# EAGLE board Prototype 0.1 (EAGLE 9.7.0)
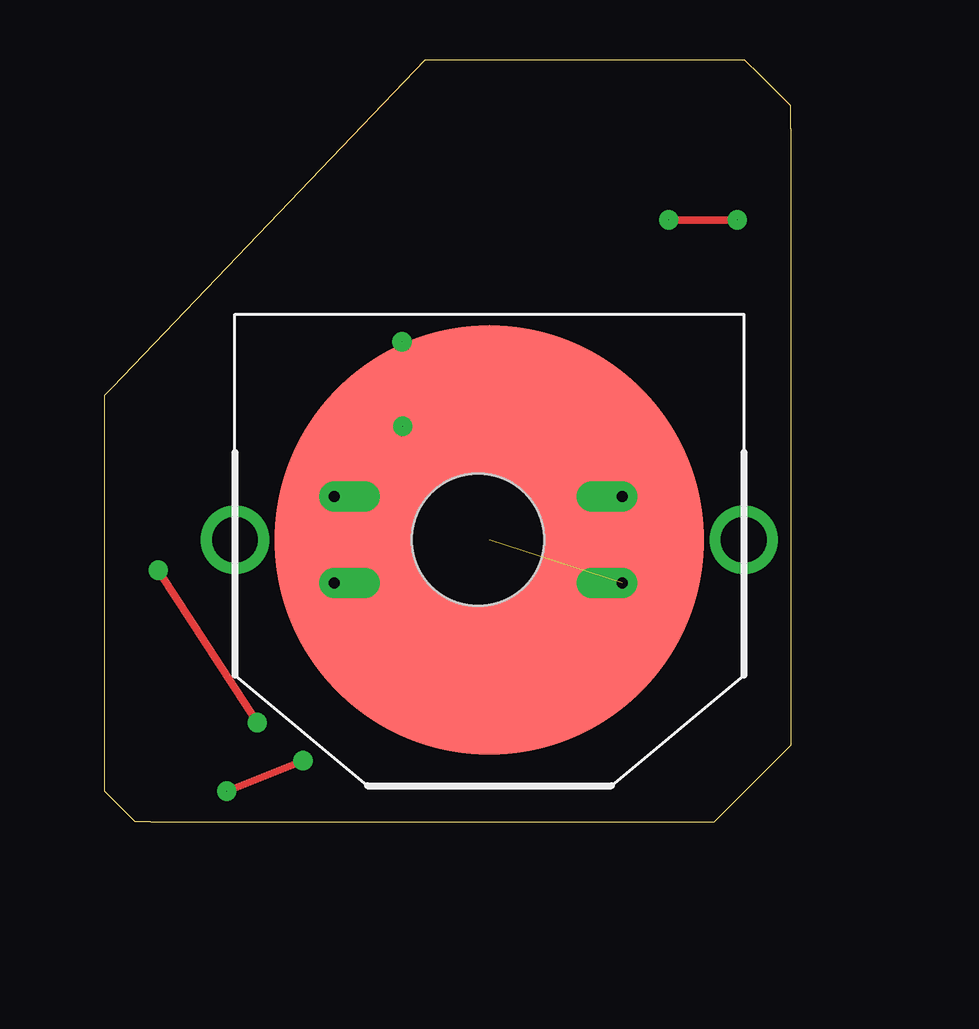
[diagram p0: board, top side]
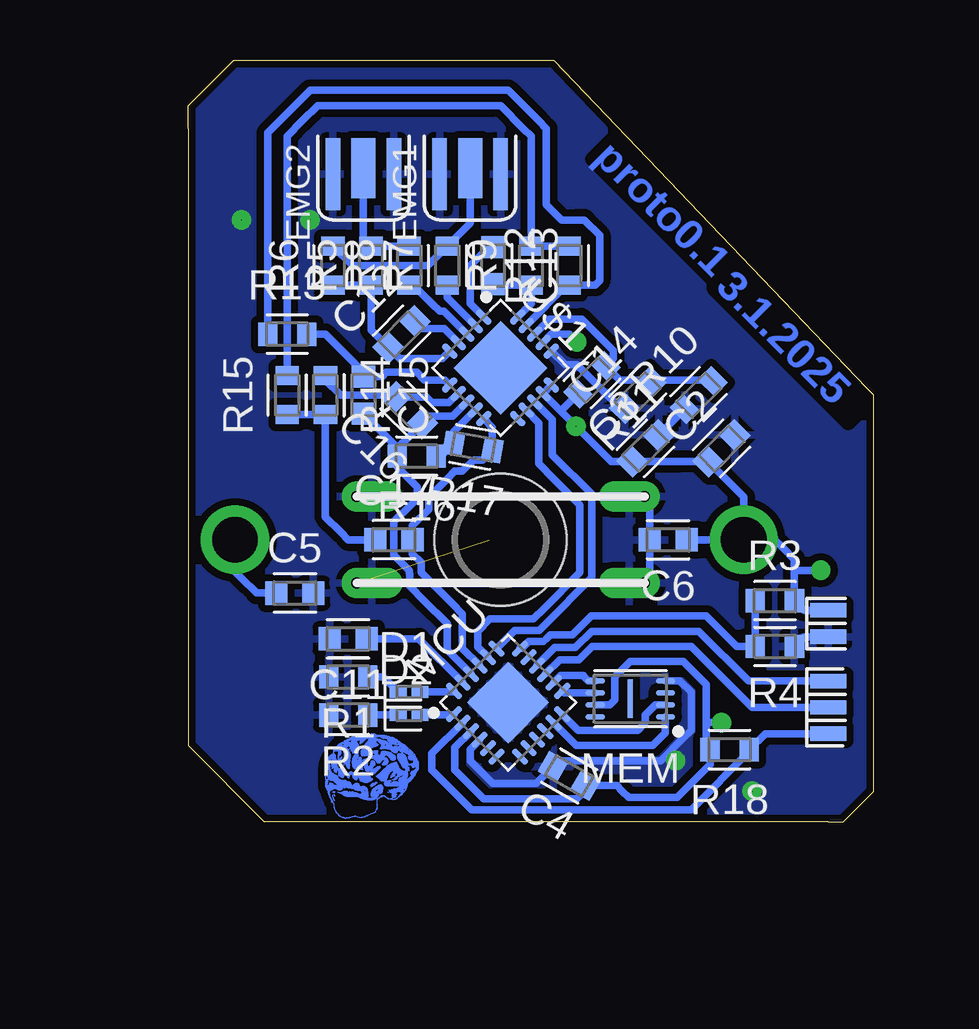
[diagram p1: board, bottom side, seen from below]

Size 28.57 x 31.75 mm. Coordinates in mm from the lower left corner, seen from the top.
Outline: 1.9,0 25.4,0 28.58,3.18 28.58,28.89 28.58,29.84 27.31,31.12 26.67,31.75 13.34,31.75 0.32,18.1 0,17.78 0,1.27 1.27,0 1.59,0 1.9,0
Copper layers (1*16): Top 0.035mm / dielectric 1.5mm / Bottom 0.035mm
Design rules "Fusion Electronics Design Rules": minimum track width 6mil, minimum drill 0.35mm, track to track 6mil, track to pad 6mil, pad to pad 6mil, via to via 6mil, smd to smd 6mil, copper to edge 12mil, drill to drill 6mil, minimum pad ring 10mil, minimum via ring 8mil, stop-mask expansion 4mil, vias tented up to drill 0mil, thermal gap 10mil

## Footprints (pad centres in the part's own frame; a part is rotated, then mirrored left to right if it is on the bottom)
BAT-HLD-005-THM = smd 17.9 x 17.9: P$1 0,0 | drill 1.9 pad 2.6: P$2 -10.6,0; P$3 10.6,0
CAPC1608X85 = smd 0.921 x 0.97: 1 -0.775,0; 2 0.775,0
ELECTRODE_CONNECTOR = drill 0.45 pad 1.27 offset: P$1 -6,1.8; P$2 -6,-1.8; P$3 6,-1.8; P$4 6,1.8 | hole 5.5: 0,0
LEDC1005X25N_FLAT-R = smd 0.7 x 0.5: A 0.45,0; C -0.45,0
LEDC1005X25N_FLAT-Y = smd 0.7 x 0.5: A 0.45,0; C -0.45,0
SHIELDED-SMD = smd 3 x 0.6: GND1 0,1.27; GND2 0,-1.27 | smd 2.5 x 1: SIG 0.25,0
QFN50P400X400X100-25T240 = smd 0.837 x 0.27: 1 -1.937,1.25; 2 -1.937,0.75; 3 -1.937,0.25; 4 -1.937,-0.25; 5 -1.937,-0.75; 6 -1.937,-1.25; 13 1.937,-1.25; 14 1.937,-0.75; 15 1.937,-0.25; 16 1.937,0.25; 17 1.937,0.75; 18 1.937,1.25 | smd 0.27 x 0.837: 7 -1.25,-1.937; 8 -0.75,-1.937; 9 -0.25,-1.937; 10 0.25,-1.937; 11 0.75,-1.937; 12 1.25,-1.937; 19 1.25,1.937; 20 0.75,1.937; 21 0.25,1.937; 22 -0.25,1.937; 23 -0.75,1.937; 24 -1.25,1.937 | smd 2.4 x 2.4: 25 0,0
SON50P300X200X50-8 = smd 0.787 x 0.22: 1 -1.462,0.75; 2 -1.462,0.25; 3 -1.462,-0.25; 4 -1.462,-0.75; 5 1.462,-0.75; 6 1.462,-0.25; 7 1.462,0.25; 8 1.462,0.75 | smd 0.2 x 1.6: 9 0,0
RESC1608X60 = smd 0.799 x 0.974: 1 -0.815,0; 2 0.815,0
3X = smd 1.5 x 0.6: 1 0,1.1; 2 0,0; 3 0,-1.1
2X = smd 1.5 x 0.6: 1 0,0.55; 2 0,-0.55
QFN50P400X400X80-21T275 = smd 0.8 x 0.3: 1 -2,1; 2 -2,0.5; 3 -2,0; 4 -2,-0.5; 5 -2,-1; 11 2,-1; 12 2,-0.5; 13 2,0; 14 2,0.5; 15 2,1 | smd 0.3 x 0.8: 6 -1,-2; 7 -0.5,-2; 8 0,-2; 9 0.5,-2; 10 1,-2; 16 1,2; 17 0.5,2; 18 0,2; 19 -0.5,2; 20 -1,2 | smd 2.75 x 2.75: 21 0,0

## Placement (x,y rotation side)
BAT  2025BAT-HLD-005-THM  [BAT-HLD-005-THM]  16.02,11.75 0 top
C2  100n  [CAPC1608X85]  6.35,15.56 45 bottom
C3  100n  [CAPC1608X85]  9.53,15.56 45 bottom
C4  100n  [CAPC1608X85]  12.7,1.91 150 bottom
C5  100n  [CAPC1608X85]  24.13,9.53 0 bottom
C6  100n  [CAPC1608X85]  8.57,11.75 180 bottom
C11  10u  [CAPC1608X85]  21.91,7.62 180 bottom
C12  1n  [CAPC1608X85]  19.68,20.32 45 bottom
C13  220n  [CAPC1608X85]  15.88,23.18 270 bottom
C14  100n  [CAPC1608X85]  9.84,17.78 45 bottom
C15  220n  [CAPC1608X85]  21.27,17.78 270 bottom
C16  22n  [CAPC1608X85]  19.38,17.14 135 bottom
C17  1.5n  [CAPC1608X85]  20,11.75 0 bottom
CON  GND ELECTRODE  [ELECTRODE_CONNECTOR]  15.56,11.75 0 bottom
D1  LED_RED  [LEDC1005X25N_FLAT-R]  19.37,5.4 0 bottom
D2  LED_YELLOW  [LEDC1005X25N_FLAT-Y]  19.37,4.45 0 bottom
EMG1  SHIELDED-CONNECTOR  [SHIELDED-SMD]  16.83,26.99 90 bottom
EMG2  SHIELDED-CONNECTOR  [SHIELDED-SMD]  21.27,26.99 90 bottom
MCU  MSPM0G1107T  [QFN50P400X400X100-25T240]  15.24,4.96 45 bottom
MEM  MX25V80066USON8L  [SON50P300X200X50-8]  10.15,5.12 180 bottom
R1  100R  [RESC1608X60]  21.91,6.03 180 bottom
R2  100R  [RESC1608X60]  21.91,4.45 180 bottom
R3  140k  [RESC1608X60]  4.13,9.21 0 bottom
R4  140k  [RESC1608X60]  4.13,7.3 180 bottom
R5  10M  [RESC1608X60]  20.95,23.18 90 bottom
R6  10M  [RESC1608X60]  22.54,23.18 90 bottom
R7  180k  [RESC1608X60]  17.78,23.18 90 bottom
R8  180k  [RESC1608X60]  19.37,23.18 90 bottom
R9  140k  [RESC1608X60]  14.29,23.18 90 bottom
R10  10M  [RESC1608X60]  7.3,17.78 45 bottom
R11  10M  [RESC1608X60]  11.75,18.41 225 bottom
R12  140k  [RESC1608X60]  12.7,23.18 90 bottom
R13  1.4M  [RESC1608X60]  24.45,20.32 0 bottom
R14  44k  [RESC1608X60]  22.86,17.78 270 bottom
R15  44k  [RESC1608X60]  24.45,17.78 90 bottom
R16  100k  [RESC1608X60]  19.05,15.24 180 bottom
R17  1M  [RESC1608X60]  16.7,15.62 170 bottom
R18  47k  [RESC1608X60]  6.01,3 180 bottom
SWD  SWD  [3X]  1.9,4.76 180 bottom
SWD-PWR  PWR  [2X]  1.9,8.26 180 bottom
U$1  AD8232LFCSP  [QFN50P400X400X80-21T275]  15.56,18.91 315 bottom

## Library data of the parts
BAT = batery holder
C2-C6 C11-C17 = Capacitor; CATEGORY: Capacitor; PACKAGE_SIZE: 0603; PACKAGE_TYPE: SMD; SUBCATEGORY: Ceramic Capacitors; TYPE: MLCC
CON EMG1 EMG2 U$1 = Ecg Electrodes
D1 = LED; CATEGORY: LED; COLOR: RED; DESCRIPTION: CHIP LED FLAT; SUB-CATEGORY: CHIP; TYPE: FLAT_TOP
D2 = LED; CATEGORY: LED; COLOR: YELLOW; DESCRIPTION: CHIP LED FLAT; SUB-CATEGORY: CHIP; TYPE: FLAT_TOP
MCU = Texas Instruments
MEM = MemoryChips
R1-R18 = Resistor; CATEGORY: Resistors; DESCRIPTION: Chip Resistor 1.60 X 0.82 X 0.60 mm body 0603(1608-METRIC) Package; PACKAGE_SIZE: 0603; PACKAGE_TYPE: SMD
SWD SWD-PWR = DebugConnectors§

## Nets
BATT_VOLTAGE [Analog]: MCU.18 R3.1 R4.2
COM_CE [Data]: MCU.6
COM_CS [Data]: MCU.5
COM_IRQ [Data]: MCU.7
EMG_DIFFERENTIAL [Analog]: C17.2 MCU.21 R17.1 U$1.10
EMG_EN [Data]: MCU.19 U$1.13
EMG_LEAD_OFF [Data]: MCU.20 U$1.12
EMG_REFFERENCE [Analog]: C15.2 C16.1 MCU.22 R16.2 U$1.8
GND: BAT.P$1 C2.2 C3.2 C4.2 C5.2 C6.2 C11.2 C14.1 CON.P$1 CON.P$2 CON.P$3 CON.P$4 EMG1.GND1 EMG1.GND2 EMG2.GND1 EMG2.GND2 MCU.4 MCU.25 MEM.4 R1.2 R2.2 R4.1 R10.1 SWD-PWR.1 U$1.16
MEM_CS [Data]: MCU.11 MEM.1
N$2 [VCC]: C11.1 MCU.23
N$3: D1.C R1.1
N$4: D2.C R2.1
N$8 [Data]: D1.A MCU.24
N$9 [Data]: D2.A MCU.1
N$10 [Analog]: EMG1.SIG R6.2 R7.2
N$11 [Analog]: EMG2.SIG R5.2 R8.2
N$12 [Analog]: R7.1 U$1.2
N$13 [Analog]: R8.1 U$1.3
N$14 [Analog]: C16.2 R14.1 U$1.7
N$16 [Analog]: R16.1 R17.2 U$1.9
N$17 [Analog]: R9.2 R12.2 R15.2
N$18 [Analog]: C12.1 R5.1 R6.1 U$1.5
N$19 [Analog]: C13.1 U$1.1
N$20 [Analog]: C13.2 R9.1 U$1.20
N$22 [Analog]: C14.2 R10.2 R11.1 U$1.18
N$24 [Analog]: C15.1 R13.2 U$1.6
N$25: C17.1 R14.2 R15.1
N$26 [Analog]: R12.1 R13.1 U$1.19
N$27 [Analog]: C12.2 U$1.4
RST [Data]: MCU.2 R18.1 SWD.1
SPI0_MISO [Data]: MCU.9
SPI0_MOSI [Data]: MCU.8
SPI0_SCK [Data]: MCU.10
SPI1_MISO [Data]: MCU.12 MEM.2
SPI1_MOSI [Data]: MCU.14 MEM.5
SPI1_SCK [Data]: MCU.13 MEM.6
SWCLK [Data]: MCU.16 SWD.3
SWDIO [Data]: MCU.15 SWD.2
VCC [VCC]: BAT.P$2 BAT.P$3 C2.1 C3.1 C4.1 C5.1 C6.1 MCU.3 MEM.7 R3.2 R11.2 R18.2 SWD-PWR.2 U$1.14 U$1.15 U$1.17

## Tracks (layer width: path | path; a pad name or v marks a point on that pad's centre or on a via)
BATT_VOLTAGE
  Bottom 0.305: R3.1 R4.2 5.71,7.3 6.99,8.57 11.77,8.57 12.56,7.78 13.49,7.78 13.65,7.62 13.77,7.5 14.38,7.5 14.67,7.21 MCU.18
EMG_DIFFERENTIAL
  Bottom 0.305: MCU.21 17.15,7.22 17.15,8.26 17.15,8.66 17.58,9.09 18.87,10.38 18.87,10.79 19.23,11.16 C17.2 19.23,12.34 18.55,13.02 18.55,13.52 17.78,14.29 17.46,14.6 17.15,14.6 16.67,15.08 16.3,15.08 R17.1 15.9,16.43 U$1.10
EMG_EN
  Bottom 0.305: MCU.19 14.96,7.98 13.94,7.98 13.66,8.26 11.79,10.13 | U$1.13 13.4,16.76 13.4,15.29 11.77,13.65 11.77,10.15 | 11.79,10.13 11.77,10.15 | 11.79,10.13 11.77,10.15
EMG_LEAD_OFF
  Bottom 0.305: 12.25,10.38 12.25,13.02 12.25,13.2 13.34,14.29 13.97,14.92 13.97,15.56 13.97,16.62 U$1.12 | MCU.20 16.51,7.29 16.51,7.94 16.01,8.44 15.24,8.44 14.19,8.44 13.74,8.89 | 13.74,8.89 12.25,10.38 | 13.74,8.89 12.25,10.38
EMG_REFFERENCE
  Bottom 0.305: MCU.22 17.78,7.15 17.78,7.62 17.78,8.26 18.73,9.21 19.35,9.82 19.35,10.34 19.37,10.36 19.37,10.48 20,11.11 20,12.38 20,12.5 19.37,13.14 19.03,13.48 19.03,13.95 19.37,14.29 19.87,14.79 R16.2 | U$1.8 17.56,16.91 18.51,16.91 C16.1 19.35,16.08 19.87,15.56 R16.2 | C15.2 19.87,15.6 R16.2
GND  (via drill 0 pad 0.8)  (1 unrouted)
  Top 0.305: v8.26,2.54 v5.08,1.27 | v26.35,25.08 v23.49,25.08
  Bottom 0.305: U$1.16 12.86,19.05 12.38,19.05 10.56,17.23 C14.1 10.39,17.69 | MCU.4 16.83,3.02 16.83,2.54 15.87,1.59 14.6,1.59 14.08,1.59 C4.2 13.12,2.54 12.07,2.54 8.89,2.54 7.94,3.49 7.62,3.81 7.62,4.76 7.62,5.4 8.09,5.87 MEM.4 | R4.1 2.91,7.71 SWD-PWR.1 | C3.2 R10.1 | CON.P$3 9.35,10.16 C6.2 9.35,13.34 CON.P$4
  pour Bottom (isolate 0.305): 1.33,0.15 25.34,0.15 28.42,3.24 28.42,29.78 26.61,31.6 13.08,31.6 0.15,18.67 0.15,1.33
MEM_CS
  Bottom 0.305: MCU.11 12.39,3.18 10.79,3.18 9.21,3.18 8.69,3.69 MEM.1
N$2
  Bottom 0.305: C11.1 18.96,7.62 MCU.23
N$3
  Bottom 0.305: R1.1 20.45,6.03 D1.C
N$4
  Bottom 0.305: D2.C R2.1
N$8
  Bottom 0.305: D1.A 17.54,5.4 MCU.24
N$9
  Bottom 0.305: D2.A 17.52,4.45 MCU.1
N$10
  Bottom 0.305: R6.2 21.73,23.18 21.59,23.18 18.6,23.18 R7.2 16.83,24.95 16.83,26.99 | EMG1.SIG 16.83,26.99 | 16.83,26.99 16.83,26.67
N$11
  Bottom 0.305: R8.2 R5.2 21.27,24.31 21.27,26.99 EMG2.SIG
N$12
  Bottom 0.305: U$1.2 17.78,21.84 R7.1
N$13
  Bottom 0.305: U$1.3 17.92,21.27 18.1,21.27 18.42,21.59 19.19,22.36 R8.1
N$14
  Bottom 0.305: U$1.7 17.72,17.46 18.42,17.46 18.65,17.69 C16.2 20.01,17.78 22.22,17.78 22.86,18.41 R14.1
N$16
  Bottom 0.305: 18.03,15.24 R16.1 18.03,15.24 | U$1.9 17.5,16.26 R17.2 18.03,15.24
N$17
  Bottom 0.305: R12.2 R9.2 14.29,28.57 14.6,28.89 15.56,29.84 19.05,29.84 23.18,29.84 23.81,29.21 24.45,28.57 R15.2
N$18
  Bottom 0.305: U$1.5 18,19.3 19.76,19.3 C12.1 20.95,20.49 R5.1 R6.1
N$19
  Bottom 0.305: U$1.1 16.83,21.6 16.83,23.18 16.05,23.95 C13.1
N$20
  Bottom 0.305: U$1.20 14.29,21.6 R9.1 15.83,22.36 C13.2
N$22
  Bottom 0.305: U$1.18 13.52,20.96 12.18,20.96 10.85,19.63 10.85,19.31 R11.1 10.59,18.41 10.16,18.41 9.38,18.41 C14.2 9.21,18.41 6.78,18.41 R10.2
N$24
  Bottom 0.305: U$1.6 17.89,18.41 18.42,18.41 18.73,18.41 19.05,18.73 19.37,18.73 20.32,18.73 20.5,18.55 C15.1 21.27,18.73 21.91,19.37 22.86,20.32 R13.2
N$25
  Bottom 0.305: C17.1 21.91,11.75 22.22,12.07 22.86,12.7 R14.2 R15.1
N$26
  Bottom 0.305: U$1.19 12.82,22.36 R12.1 11.61,22.36 11.43,22.54 11.43,24.45 12.07,25.08 12.38,25.08 13.02,25.08 13.65,25.72 13.65,27.62 13.65,28.89 13.97,29.21 15.24,30.48 23.49,30.48 24.45,29.53 25.26,28.71 R13.1
N$27
  Bottom 0.305: C12.2 18.82,20.55 17.9,20.55 U$1.4
RST
  Bottom 0.305: SWD.1 4.28,3.66 4.54,3.66 R18.1 5.2,2.92 7.62,0.5 16.76,0.5 18.42,2.15 18.42,2.54 18.42,2.85 MCU.2
SPI1_MISO
  Bottom 0.305: MCU.12 12.32,3.81 9.84,3.81 9.52,4.13 9.52,4.45 9.1,4.87 MEM.2
SPI1_MOSI
  Bottom 0.305: MEM.5 11.9,5.87 12.07,6.03 12.12,6.09 13.05,6.09 MCU.14
SPI1_SCK
  Bottom 0.305: MCU.13 12.91,5.37 MEM.6
SWCLK
  Bottom 0.305: MCU.16 13.29,7.26 12.44,7.26 11.76,7.94 7.29,7.94 5.22,5.86 SWD.3
SWDIO
  Bottom 0.305: MCU.15 13.1,6.75 12.3,6.75 11.75,7.3 7.62,7.3 6.35,6.03 5.08,4.76 SWD.2
VCC  (via drill 0 pad 0.8)
  Top 0.305: v6.35,4.13 v2.22,10.48 | v12.38,20 12.41,19.97 v12.41,16.48
  Bottom 0.305: MCU.3 17.46,3.09 17.46,2.16 16.26,0.95 12.38,0.95 12.03,1.31 C4.1 10.73,1.52 10.48,1.27 10.22,1.02 8.19,1.02 6.83,2.38 R18.2 6.99,3.16 6.99,4.13 | MEM.7 11.01,4.87 10.79,5.08 10.79,6.03 10.16,6.67 8.57,6.67 7.94,6.67 7.62,6.35 6.99,5.72 6.99,4.13 | U$1.15 U$1.14 13.05,17.11 | 13.05,17.11 R11.2 | U$1.17 13.44,20.32 13.02,20.32 12.7,20.32 v12.38,20 | 13.05,17.11 v12.41,16.48 10.95,15.01 C3.1 8.17,15.01 C2.1 5.42,13.54 BAT.P$2 | 5.42,12.41 BAT.P$2 | 3.31,10.48 R3.2 3.23,9.12 2.91,8.81 SWD-PWR.2 | 3.31,10.48 3.31,10.93 3.81,11.43 4.13,11.75 BAT.P$2 | v2.22,10.48 3.31,10.48 | C5.1 25.72,9.52 26.35,10.16 26.62,10.43 BAT.P$3 | BAT.P$2 C6.1 | v6.35,4.13 6.99,4.13
(copper drawn outside any net)
  shapes: Bottom area x1331

## Text on the board
Bottom: proto0.1 | 3.1.2025